# EAGLE board output stage v1 (EAGLE 9.5.0)
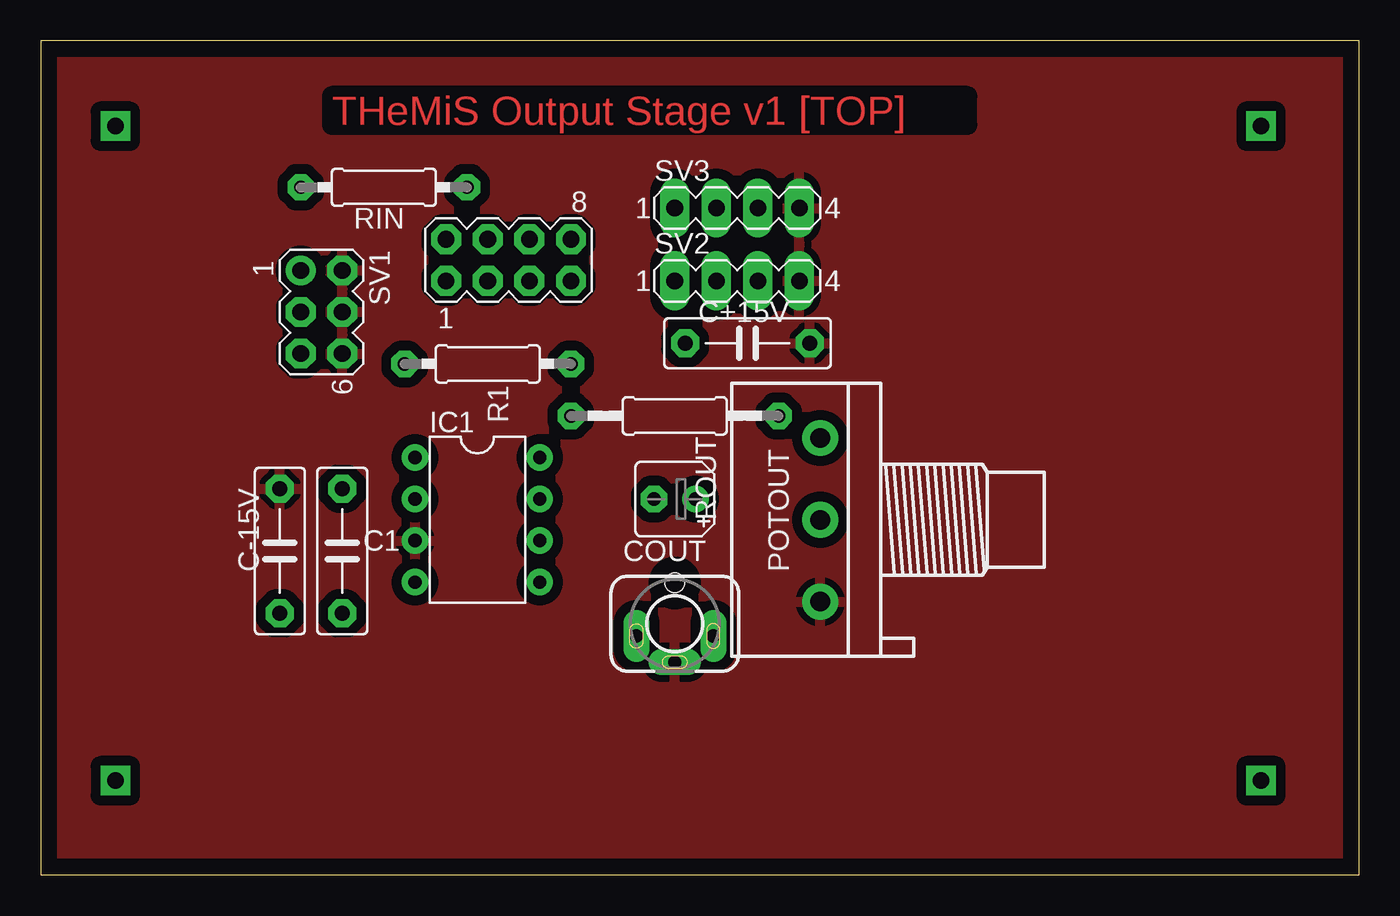
[diagram p0: board, top side]
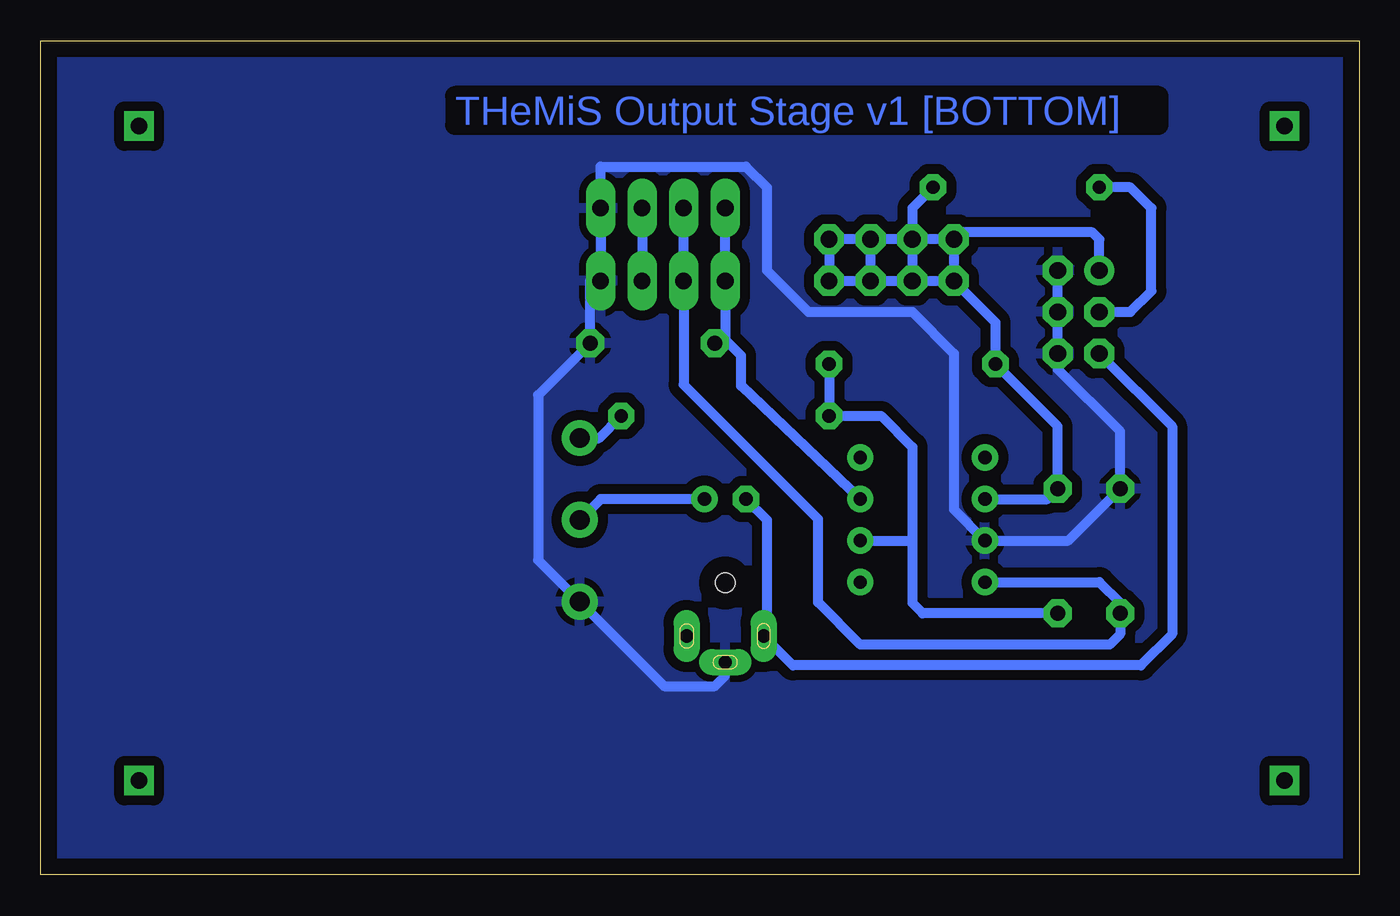
[diagram p1: board, bottom side, seen from below]

Size 80.55 x 50.95 mm. Coordinates in mm from the lower left corner, seen from the top.
Outline: 0,0 80.55,0 80.55,50.95 0,50.95 0,0
Copper layers (1*16): Top 0.035mm / dielectric 1.5mm / Bottom 0.035mm
Design rules "ENSEA_2019": minimum track width 0.4mm, minimum drill 0.6mm, track to track 0.4mm, track to pad 0.4mm, pad to pad 0.4mm, via to via 0.4mm, smd to smd 0.4mm, copper to edge 1mm, drill to drill 0.4mm, minimum pad ring 0.4mm, minimum via ring 0.4mm, stop-mask expansion 4mil, vias tented up to drill 0mil, thermal gap 0.4mm

## Footprints (pad centres in the part's own frame; a part is rotated, then mirrored left to right if it is on the bottom)
C075-032X103 = drill 0.914 octagon: 1 -3.81,0; 2 3.81,0
B45181A = drill 0.813 pad 1.6: + -1.27,0 | drill 0.813 pad 1.6 octagon: - 1.27,0
DIL08 = drill 0.813 pad 1.27: 1 -3.81,-3.81; 2 -1.27,-3.81; 3 1.27,-3.81; 4 3.81,-3.81; 5 3.81,3.81; 6 1.27,3.81; 7 -1.27,3.81; 8 -3.81,3.81
1502_01 = drill 0.8 pad 1.2 long: 1 0,2.35; 2 -2.35,0.75; 3 2.35,0.75 | hole 1.2: 0,-2.5
3RP/1610N = drill 1.2 pad 2.184: 1 -5,0; 2 0,0; 3 5,0
0207/10 = drill 0.813 octagon: 1 -5.08,0; 2 5.08,0
0207/12 = drill 0.813 octagon: 1 -6.35,0; 2 6.35,0
MA04-2 = drill 1.016 octagon: 1 -3.81,-1.27; 2 -3.81,1.27; 3 -1.27,-1.27; 4 -1.27,1.27; 5 1.27,-1.27; 6 1.27,1.27; 7 3.81,-1.27; 8 3.81,1.27
MA03-2 = drill 1.016: 1 -2.54,-1.27 | drill 1.016 octagon: 2 -2.54,1.27; 3 0,-1.27; 4 0,1.27; 5 2.54,-1.27; 6 2.54,1.27
MA04-1 = drill 1.016 long: 1 -3.81,0; 2 -1.27,0; 3 1.27,0; 4 3.81,0

## Placement (x,y rotation side)
C1  560p  [C075-032X103]  18.41,19.78 90 top
C+15V  100n  [C075-032X103]  43.18,32.48 180 top
C-15V  100n  [C075-032X103]  14.61,19.78 90 top
COUT  22u  [B45181A]  38.73,22.96 180 top
IC1  NE5534AN  [DIL08]  26.67,21.69 270 top
OUTPUT_JACK  1502_01  [1502_01]  38.73,15.34 180 top
POTOUT  100kB  [3RP/1610N]  47.62,21.69 90 top
R1  27k  [0207/10]  27.3,31.21 180 top
RIN  10k  [0207/10]  20.95,42 180 top
ROUT  470  [0207/12]  38.73,28.04 180 top
SUMMING_HEADER  [MA04-2]  28.58,37.56 0 top
SV1  [MA03-2]  17.14,34.38 270 top
SV2  [MA04-1]  42.55,36.29 0 top
SV3  [MA04-1]  42.55,40.73 0 top

## Library data of the parts
C1 C+15V C-15V = rcl; SPICEPREFIX: C
COUT = resistor
IC1 = linear
OUTPUT_JACK = con-lumberg; OC_FARNELL: 4739747; OC_NEWARK: unknown
POTOUT = pot
R1 RIN ROUT = rcl; SPICEPREFIX: R
SUMMING_HEADER SV1-SV3 = con-lstb; OC_FARNELL: unknown; OC_NEWARK: unknown

## Nets
5V: SV2.3 SV3.3
+15V: C+15V.2 IC1.7 SV2.1 SV3.1
-15V: C-15V.1 IC1.4 SV2.2 SV3.2
AGND: C+15V.1 C-15V.2 IC1.3 OUTPUT_JACK.1 POTOUT.1 SV1.2 SV1.4 SV1.6 SV2.4 SV3.4
IN_I: C1.2 IC1.2 R1.2 RIN.1 SUMMING_HEADER.1 SUMMING_HEADER.2 SUMMING_HEADER.3 SUMMING_HEADER.4 SUMMING_HEADER.5 SUMMING_HEADER.6 SUMMING_HEADER.7 SUMMING_HEADER.8 SV1.1
IN_V: RIN.2 SV1.3
MAIN_OUT: C1.1 IC1.6 R1.1 ROUT.2
N$8: COUT.+ POTOUT.2
N$9: POTOUT.3 ROUT.1
OUT: COUT.- OUTPUT_JACK.3 SV1.5

## Tracks (layer width: path | path; a pad name or v marks a point on that pad's centre or on a via)
5V
  Bottom 0.61: SV3.3 SV2.3
+15V
  Bottom 0.61: 38.73,32.69 SV2.1 SV3.1 | 38.73,32.69 37.77,31.72 37.77,29.87 IC1.7 | C+15V.2 39.16,32.69 38.73,32.69
-15V
  Bottom 0.61: SV3.2 SV2.2 41.27,29.94 33.06,21.73 33.06,16.64 30.48,14.07 15.24,14.07 14.61,14.7 C-15V.1 14.61,16.61 15.88,17.88 IC1.4
AGND
  Bottom 0.61: SV1.2 SV1.4 SV1.6 18.41,30.9 14.61,27.09 C-15V.2 17.78,20.42 IC1.3 24.77,22.32 24.77,31.85 27.3,34.38 33.66,34.38 36.2,36.92 36.2,42 37.46,43.27 46.35,43.27 SV3.4 SV2.4 46.99,36.29 C+15V.1 50.16,29.31 50.16,19.23 POTOUT.1 42.46,11.53 39.37,11.53 38.73,12.16 OUTPUT_JACK.1
  pour Top (isolate 0.61): 0.63,50.99 80.04,50.99 80.04,0.63 0.63,0.63
  pour Bottom (isolate 0.61): 0.63,50.99 80.04,50.99 80.04,0.63 0.63,0.63
IN_I
  Bottom 0.61: SV1.1 15.88,38.83 16.29,39.25 24.34,39.25 SUMMING_HEADER.2 | SUMMING_HEADER.4 SUMMING_HEADER.3 | SUMMING_HEADER.2 SUMMING_HEADER.4 | SUMMING_HEADER.4 SUMMING_HEADER.6 | SUMMING_HEADER.6 SUMMING_HEADER.8 SUMMING_HEADER.7 SUMMING_HEADER.5 | SUMMING_HEADER.5 SUMMING_HEADER.6 | SUMMING_HEADER.5 SUMMING_HEADER.3 | SUMMING_HEADER.3 SUMMING_HEADER.1 | RIN.1 27.3,40.73 SUMMING_HEADER.4 | SUMMING_HEADER.1 22.23,33.75 R1.2 18.41,27.4 C1.2 19.05,22.96 IC1.2 | SUMMING_HEADER.2 SUMMING_HEADER.1
IN_V
  Bottom 0.61: SV1.3 13.97,34.38 12.7,35.65 12.7,40.73 13.97,42 RIN.2
MAIN_OUT
  Bottom 0.61: C1.1 26.67,15.97 27.3,16.61 27.3,20.42 | R1.1 ROUT.2 29.21,28.04 27.3,26.13 27.3,20.42 | IC1.6 27.3,20.42
N$1  (via drill 1)
  other vias: 4.55,45.74
N$2  (via drill 1)
  other vias: 4.55,5.75
N$3  (via drill 1)
  other vias: 74.56,5.75
N$4  (via drill 1)
  other vias: 74.56,45.74
N$8
  Bottom 0.61: COUT.+ 46.35,22.96 POTOUT.2
N$9
  Bottom 0.61: POTOUT.3 46.44,26.68 ROUT.1
OUT
  Bottom 0.61: COUT.- 36.2,21.69 36.2,14.39 OUTPUT_JACK.3 34.59,12.8 13.34,12.8 11.43,14.7 11.43,27.4 SV1.5

## Text on the board
Top: THeMiS Output Stage v1 [TOP]
Bottom: THeMiS Output Stage v1 [BOTTOM]